# Altium PCB polynomial_distribution.PcbDoc
Units mm, origin at the board's own origin, x right, y up, seen from the top; angles counter-clockwise.
Board outline 42.93 x 65.02 mm, 2 copper layers (Top Layer, Bottom Layer); 5 components, 10 nets, 54 pads, 3 vias.
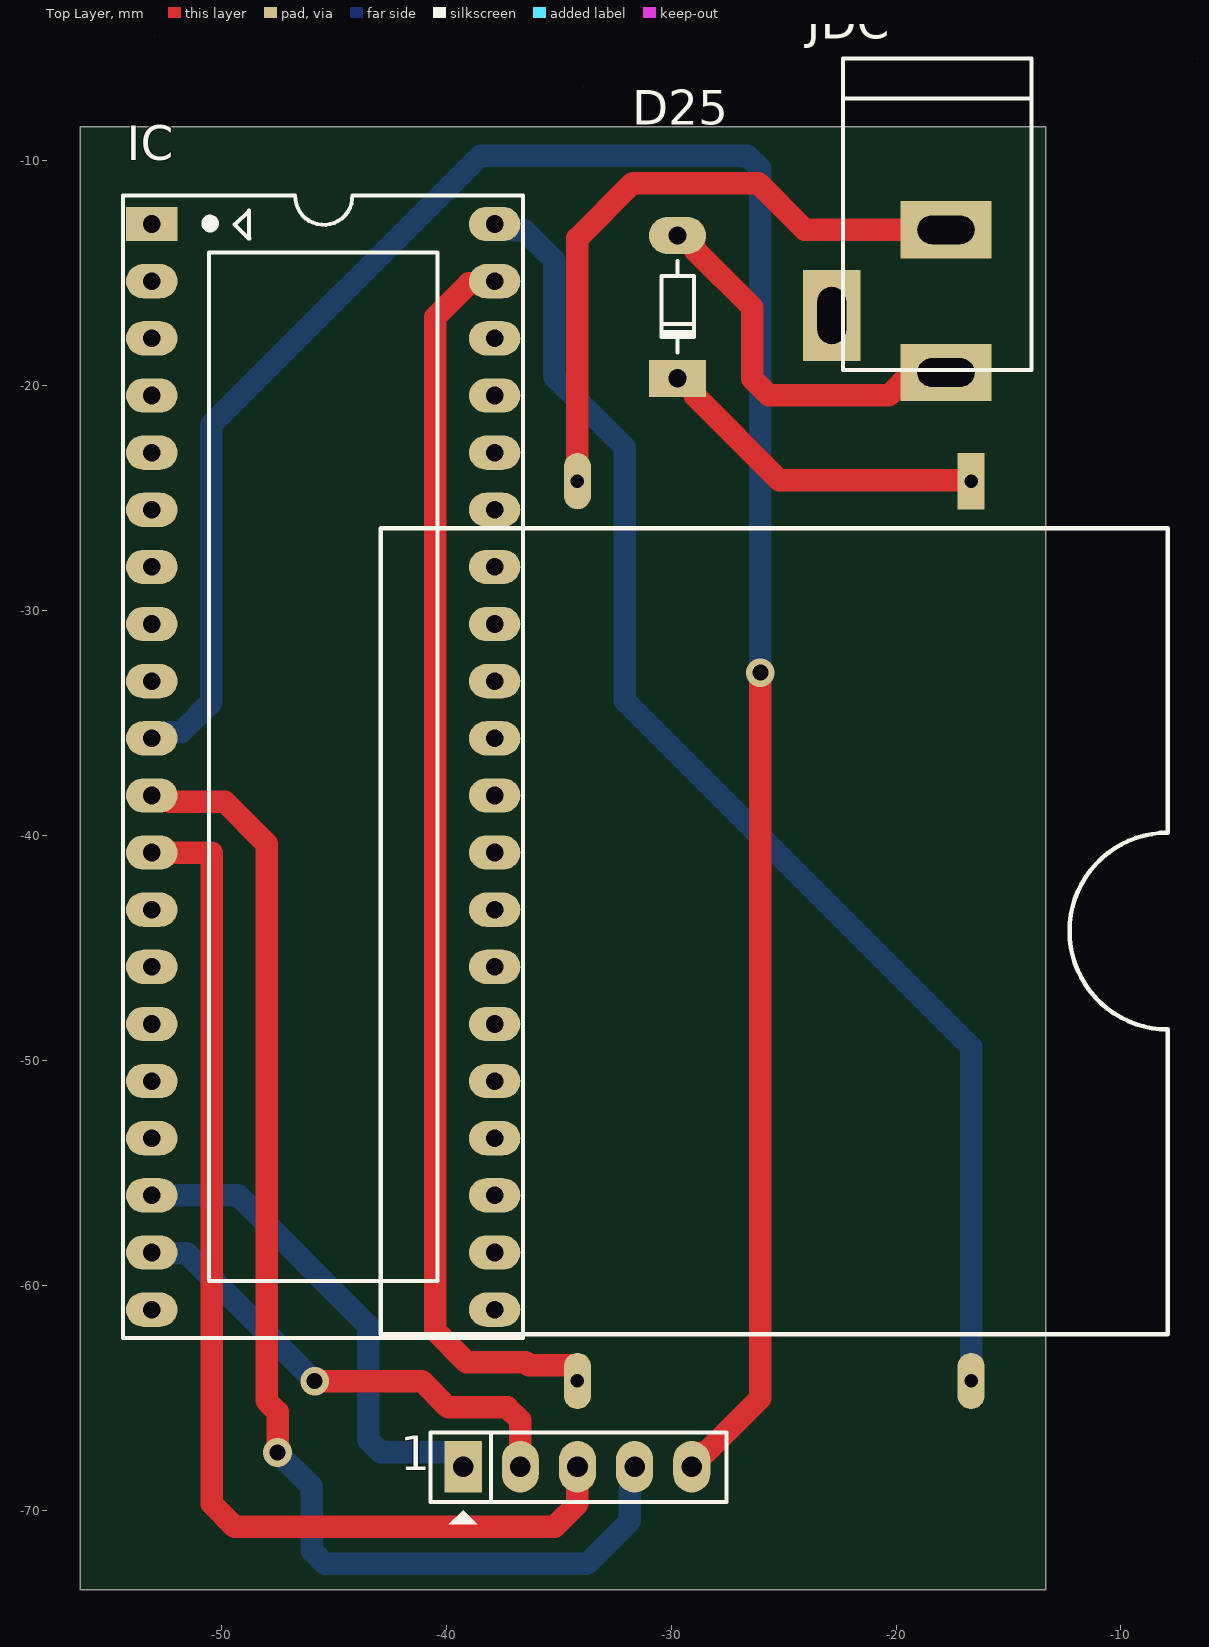
[diagram p0: Top Layer view]
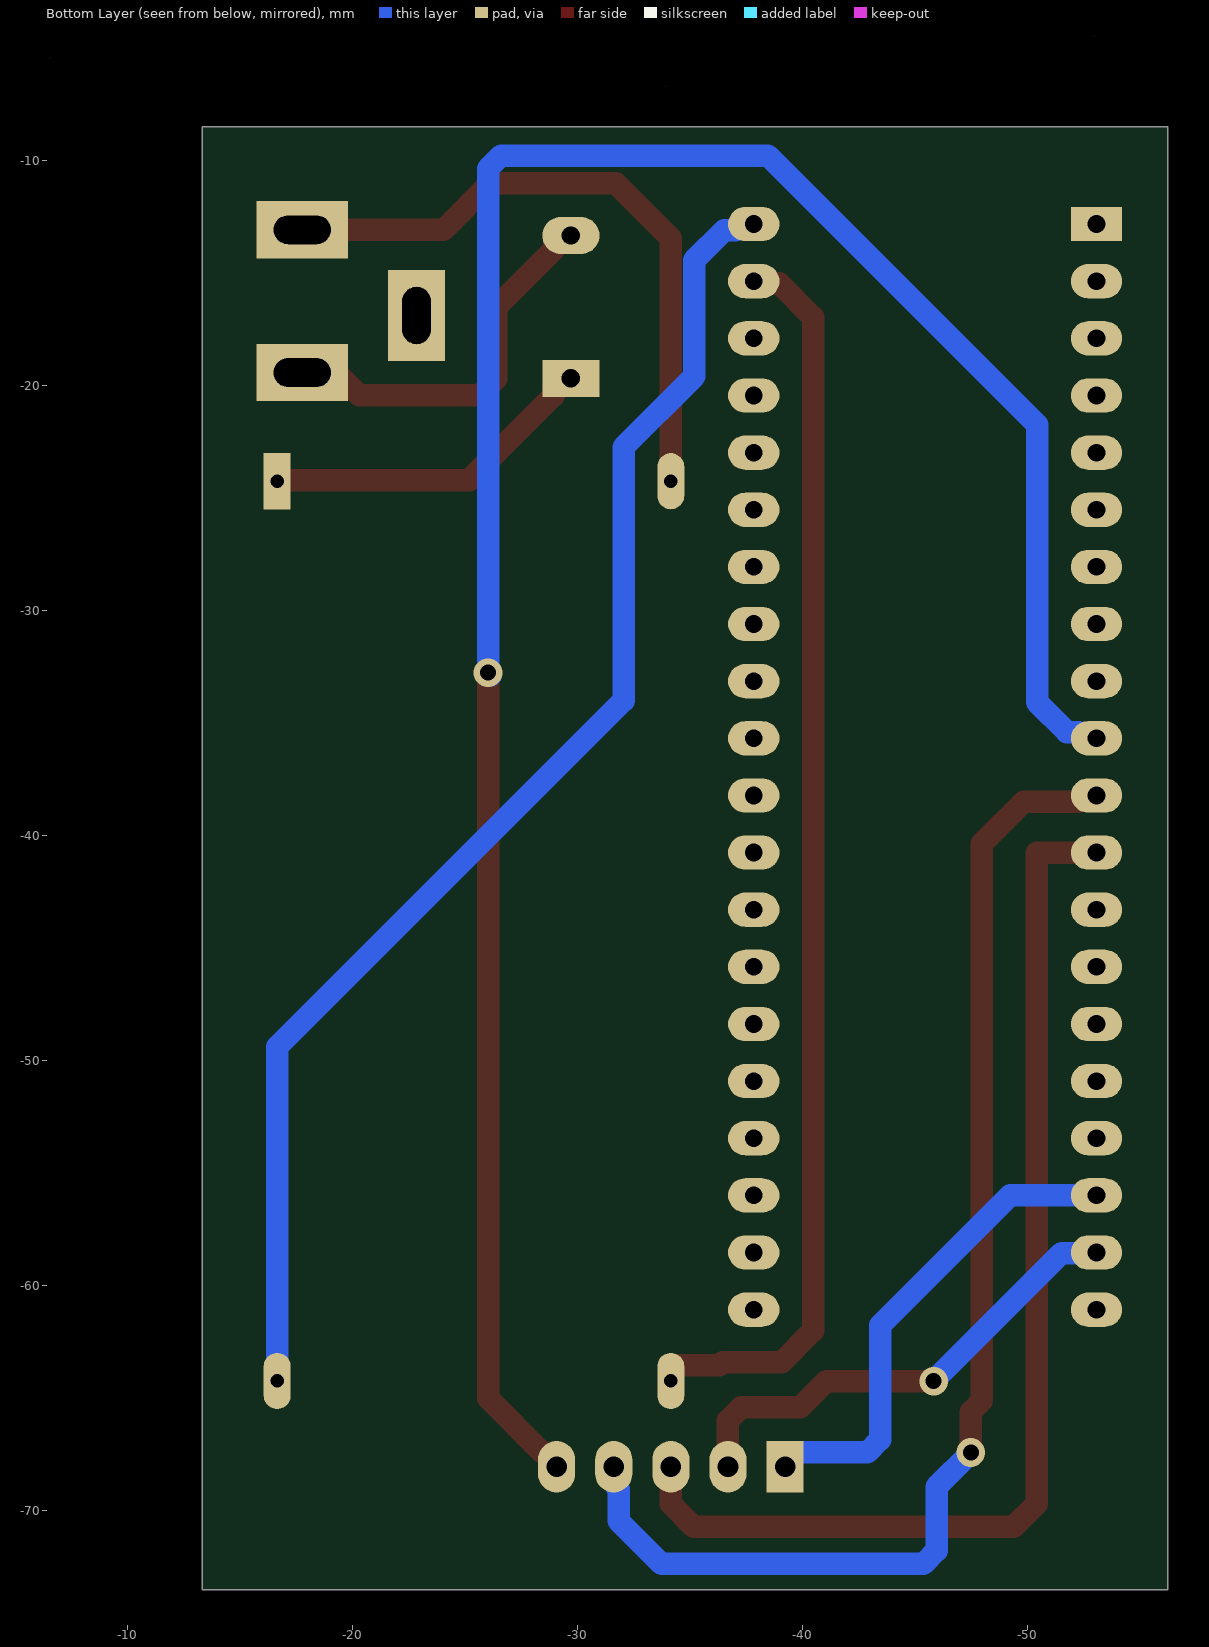
[diagram p1: Bottom Layer view, seen from below]
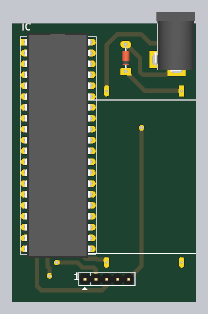
[diagram p2: 3D render of the assembled board from above, using the file's embedded part models]

## Layer stack, top to bottom
Top Solder: solder mask 0.0102, Solder Resist, Dk 3.5
Top Layer: signal copper 0.0356
Dielectric 1: dielectric 0.32, FR-4, Dk 4.8
Bottom Layer: signal copper 0.0356
Bottom Solder: solder mask 0.0102, Solder Resist, Dk 3.5

## Board outline
-56.261,-8.509 -56.261,-73.533 -13.335,-73.533 -13.335,-8.509
cut-out: -41.91,162.687
cut-out: 30.734,4.064
cut-out: 30.734,-84.328
cut-out: -33.909,-6.731
cut-out: -52.578,-86.614
cut-out: -52.578,1.778
cut-out: -14.859,-94.234
cut-out: -33.528,200.152
cut-out: 12.827,231.775
cut-out: -14.478,224.536
cut-out: 77.851,231.521
cut-out: -136.398,112.141
cut-out: -155.067,32.258
cut-out: -136.398,200.533
cut-out: -155.067,120.65
cut-out: -90.043,232.156
cut-out: -117.348,224.917
cut-out: -117.348,136.525
cut-out: -25.019,231.902
cut-out: -117.348,24.638
cut-out: -58.039,-4.953
cut-out: -76.708,-84.836
cut-out: -76.708,3.556
cut-out: -38.989,-92.456
cut-out: -117.983,-92.964
cut-out: -117.983,18.923
cut-out: -117.983,107.315
cut-out: -25.273,-85.344
cut-out: -6.604,-5.461
cut-out: -155.702,3.048
cut-out: -52.959,-4.445
cut-out: -137.033,82.931
cut-out: -155.702,-85.344
cut-out: -52.959,-92.837
cut-out: -137.033,-5.461

## Design rules (kind name [scope] priority, off if disabled: settings)
Clearance [All] p1: gap=1 ignorepadtopadclearanceinfootprint=FALSE
PolygonConnect [All] p1: connectstyle=Relief reliefconductorwidth=0.254 reliefentries=4 polygonreliefangle="90 Angle" airgapwidth=0.254
RoomDefinition polynomial_distribution [InComponentClass('polynomial_distribution')] p1: confinementstyle=ConfineIn formatcopy=TRUE lockcomponents=FALSE outline -61.722,-94.615 4.953,-94.615 4.953,2.794 -61.722,2.794
RoutingVias [All] p1: holewidth=0.711 width=1.27 viastyle="Through Hole" minholewidth=0.711 minwidth=1.27 maxholewidth=0.711 maxwidth=1.27
SolderMaskExpansion [All] p1: expansion=0.102
Width [All] p1: maxlimit=1 minlimit=1 preferedwidth=1 minimp=50.000000 maximp=50.000000 favimp=50.000000
30 further rules are at their usual default settings.

## Classes and differential pairs
component class polynomial_distribution: 1 D25 IC JDC

## Components (designator, comment, footprint, x,y, rotation, side; value= is the part's Value field where it differs from the comment)
1 "JP5" JP5 -39.243,-68.072 r0 top
D25 "Diode" D0.5A -29.718,-16.51 r90 top value=1N5007
IC "STM32F103C8T6" DIP40/W0.6 -53.086,-12.827 r270 top
JDC "Jac DC" DC-IN -20.32,-16.256 r270 top
? "LM2596 Module" "LM2596 Module" -16.663,-24.257 r270 top

## Footprints (in the part's own frame and the unit in brackets; to place one, negate y for a bottom-side part, rotate by r counter-clockwise, add the part's x,y. Pads: shape width x height; smd on the part's side, far side on the other; paste and mask are expansions set on the pad)
D0.5A [mil] "Diode muoi, W 80mil, L 300mil"
  oval 65x100 hole 32: 1(125,0)
  rect 65x100 hole 32: 2(-125,0)
  silkscreen extent -80,-30 80,28, body extent -108,-33 108,32, height 61
DC-IN [mil] "Jac DC input"
  rect 100x160 hole 50 slot 100 at 90 deg: 1(125,100) 2(-125,100)
  rect 160x100 hole 50 slot 100 at 0 deg: 3(25,-100)
  silkscreen extent -425,-80 120,250, body extent -410,-105 134,269, height 434
DIP40/W0.6 [mil] "40 PIN, W 600mil, Pin to pin 100mil"
  rect 60x90 hole 31: 1(0,0)
  oval 60x90 hole 31: 2(100,0) 3(200,0) 4(300,0) 5(400,0) 6(500,0) 7(600,0) 8(700,0) 9(800,0) 10(900,0) 11(1000,0) 12(1100,0) 13(1200,0) 14(1300,0) 15(1400,0) 16(1500,0) 17(1600,0) 18(1700,0) 19(1800,0) 20(1900,0) 21(1900,600) 22(1800,600) 23(1700,600) 24(1600,600) 25(1500,600) 26(1400,600) 27(1300,600) 28(1200,600) 29(1100,600) 30(1000,600) 31(900,600) 32(800,600) 33(700,600) 34(600,600) 35(500,600) 36(400,600) 37(300,600) 38(200,600) 39(100,600) 40(0,600)
  silkscreen extent -50,-50 1950,650, body extent -82,-10 1982,600, height 224
JP5 [mil] "JP5"
  rect 65x90 hole 36: 1(0,0)
  oval 65x90 hole 36: 2(100,0) 3(200,0) 4(300,0) 5(400,0)
  silkscreen extent -57,-101 461,60, body extent -48,-53 448,45, height 323
"LM2596 Module" [mm]
  rect 2.5x1.2 hole 0.6: 1(0,0)
  oval 2.5x1.2 hole 0.6: 2(0,-17.5) 3(40,-17.5) 4(40,0)
  silkscreen extent 2.08,-26.25 37.91,8.75, body extent 37.69,-14.22 37.69,-14.22, height 0.25

## Part data
D25: "Default Diode", Code - JEDEC=DO-214-AB, Published=8-Jun-2000, Publisher="Altium Limited", Revision="July-2002: Re-released for DXP Platform."
JDC: library part DCIN, "Jac DC input"

## Via types
v1: diameter 1.27, hole 0.711, Top Layer to Bottom Layer, 3 vias

## Nets (pads, with @x,y where several pads share a name; then routed paths per layer and width w, separated by ;. In a path a pad name is that pad's centre, name@x,y a point inside that pad or via, vN(x,y) a via of type N, cw(c..) or ccw(c..) an arc to the next point about the centre after c; other vN are vias at no path point)
+3.3: ?.4 IC.40 | length 60.8
  Bottom Layer w1: IC.40 -37.323,-12.827 -37.045,-13.105 -36.528,-13.105 -35.203,-14.43 -35.203,-19.597 -32.063,-22.737 -32.063,-34.01 -16.663,-49.41 ?.4
GND: ?.2 JDC.2 | length 29.1
  Top Layer w1: ?.2 -34.163,-13.462 -31.71,-11.009 -26.125,-11.009 -24.054,-13.081 JDC.2
Net1_1: 1.1 IC.18 | length 22
  Bottom Layer w1: IC.18 -49.242,-56.007 -43.466,-61.783 -43.466,-66.863 -42.9,-67.429 -39.568,-67.429 -39.243,-67.754 1.1
Net1_2: 1.2 IC.19 | length 21.5
  Top Layer w1: v1(-45.847,-64.262) -41.079,-64.262 -39.912,-65.429 -37.289,-65.429 -36.703,-66.015 1.2
  Bottom Layer w1: IC.19 -53.058,-58.575 -51.534,-58.575 v1(-45.847,-64.262)
Net1_3: 1.3 IC.12 | length 50.4
  Top Layer w1: IC.12 -50.419,-40.767 -50.419,-69.723 -49.403,-70.739 -35.179,-70.739 -34.163,-69.723 1.3
Net1_4: 1.4 IC.11 | length 55.9
  Top Layer w1: IC.11 -52.563,-38.227 -52.285,-38.505 -49.853,-38.505 -47.982,-40.376 -47.982,-65.146 -47.498,-65.63 v1(-47.498,-67.437)
  Bottom Layer w1: v1(-47.498,-67.437) -45.974,-68.961 -45.974,-71.804 -45.388,-72.39 -33.749,-72.39 -31.837,-70.479 -31.837,-69.064 -31.748,-68.974 -31.748,-68.197 1.4
Net1_5: 1.5 IC.10 | length 104.5
  Top Layer w1: 1.5 -29.083,-67.931 -28.581,-67.429 -28.44,-67.429 -26.035,-65.024 v1(-26.035,-32.766)
  Bottom Layer w1: IC.10 -52.563,-35.687 -52.285,-35.409 -51.768,-35.409 -50.443,-34.084 -50.443,-21.741 -38.481,-9.779 -26.621,-9.779 -26.035,-10.365 v1(-26.035,-32.766) v1@-26.162,-32.893
Net_1: ?.1 D25.2 | length 15.2
  Top Layer w1: D25.2 -29.273,-19.685 -28.948,-20.01 -28.948,-20.455 -25.197,-24.206 -16.663,-24.206 ?.1
Net_3: ?.3 IC.39 | length 56
  Top Layer w1: IC.39 -37.946,-15.467 -38.986,-15.467 -40.489,-16.97 -40.489,-62.024 -39.084,-63.429 -36.46,-63.429 -36.321,-63.569 -34.255,-63.569 -34.163,-63.661 ?.3
NetD25_1: D25.1 JDC.1 | length 17.2
  Top Layer w1: D25.1 -29.45,-13.335 -28.948,-13.837 -28.948,-13.978 -26.391,-16.535 -26.391,-19.71 -25.654,-20.447 -20.32,-20.447 -19.304,-19.431 JDC.1
pads on no net: IC.1 IC.2 IC.3 IC.4 IC.5 IC.6 IC.7 IC.8 IC.9 IC.13 IC.14 IC.15 IC.16 IC.17 IC.20 IC.21 IC.22 IC.23 IC.24 IC.25 IC.26 IC.27 IC.28 IC.29 IC.30 IC.31 IC.32 IC.33 IC.34 IC.35 IC.36 IC.37 IC.38 JDC.3

## Polygon pours and split planes (outlines as drawn)
no net on Bottom Layer "Bottom Layer-No Net 3" (solid, pour order 290): 104.775,-80.01
no net on Bottom Layer "Bottom Layer-No Net 2" (solid, pour order 288): 104.775,-80.01
no net on Bottom Layer "Bottom Layer-No Net 1" (solid, pour order 286): 52.705,-3.683
no net on Bottom Layer "Bottom Layer-No Net 10" (solid, pour order 284): 49.657,-3.683
no net on Bottom Layer "Bottom Layer-No Net 11" (solid, pour order 282): 106.299,-1.524
no net on Bottom Layer "Bottom Layer-No Net 13" (solid, pour order 216): -1.143,-2.032
no net on Bottom Layer "Bottom Layer-No Net 14" (solid, pour order 206): -57.785,-4.191
no net on Bottom Layer "Bottom Layer-No Net 1" (solid, pour order 188): -16.256,224.79
no net on Bottom Layer "Bottom Layer-No Net 1" (solid, pour order 178): -119.126,225.171
no net on Bottom Layer "Bottom Layer-No Net 1" (solid, pour order 128): -119.761,107.569
no net on Bottom Layer "Bottom Layer-No Net 1" (solid, pour order 16): -54.737,-4.191
no net on Bottom Layer "Bottom Layer-No Net 2" (solid, pour order 10): -2.667,-80.518
no net on Bottom Layer "Bottom Layer-No Net 3" (solid, pour order 8): -2.667,-80.518